# Altium PCB 20K Control Board V1.1.PcbDoc (part 24 of 24)
Units mm, origin at the board's own origin, x right, y up, seen from the top; angles counter-clockwise.
Board outline 132 x 260 mm, 4 copper layers (Top Layer, GND, VCC, Bottom Layer); 1384 components, 779 nets, 4515 pads, 1774 vias.
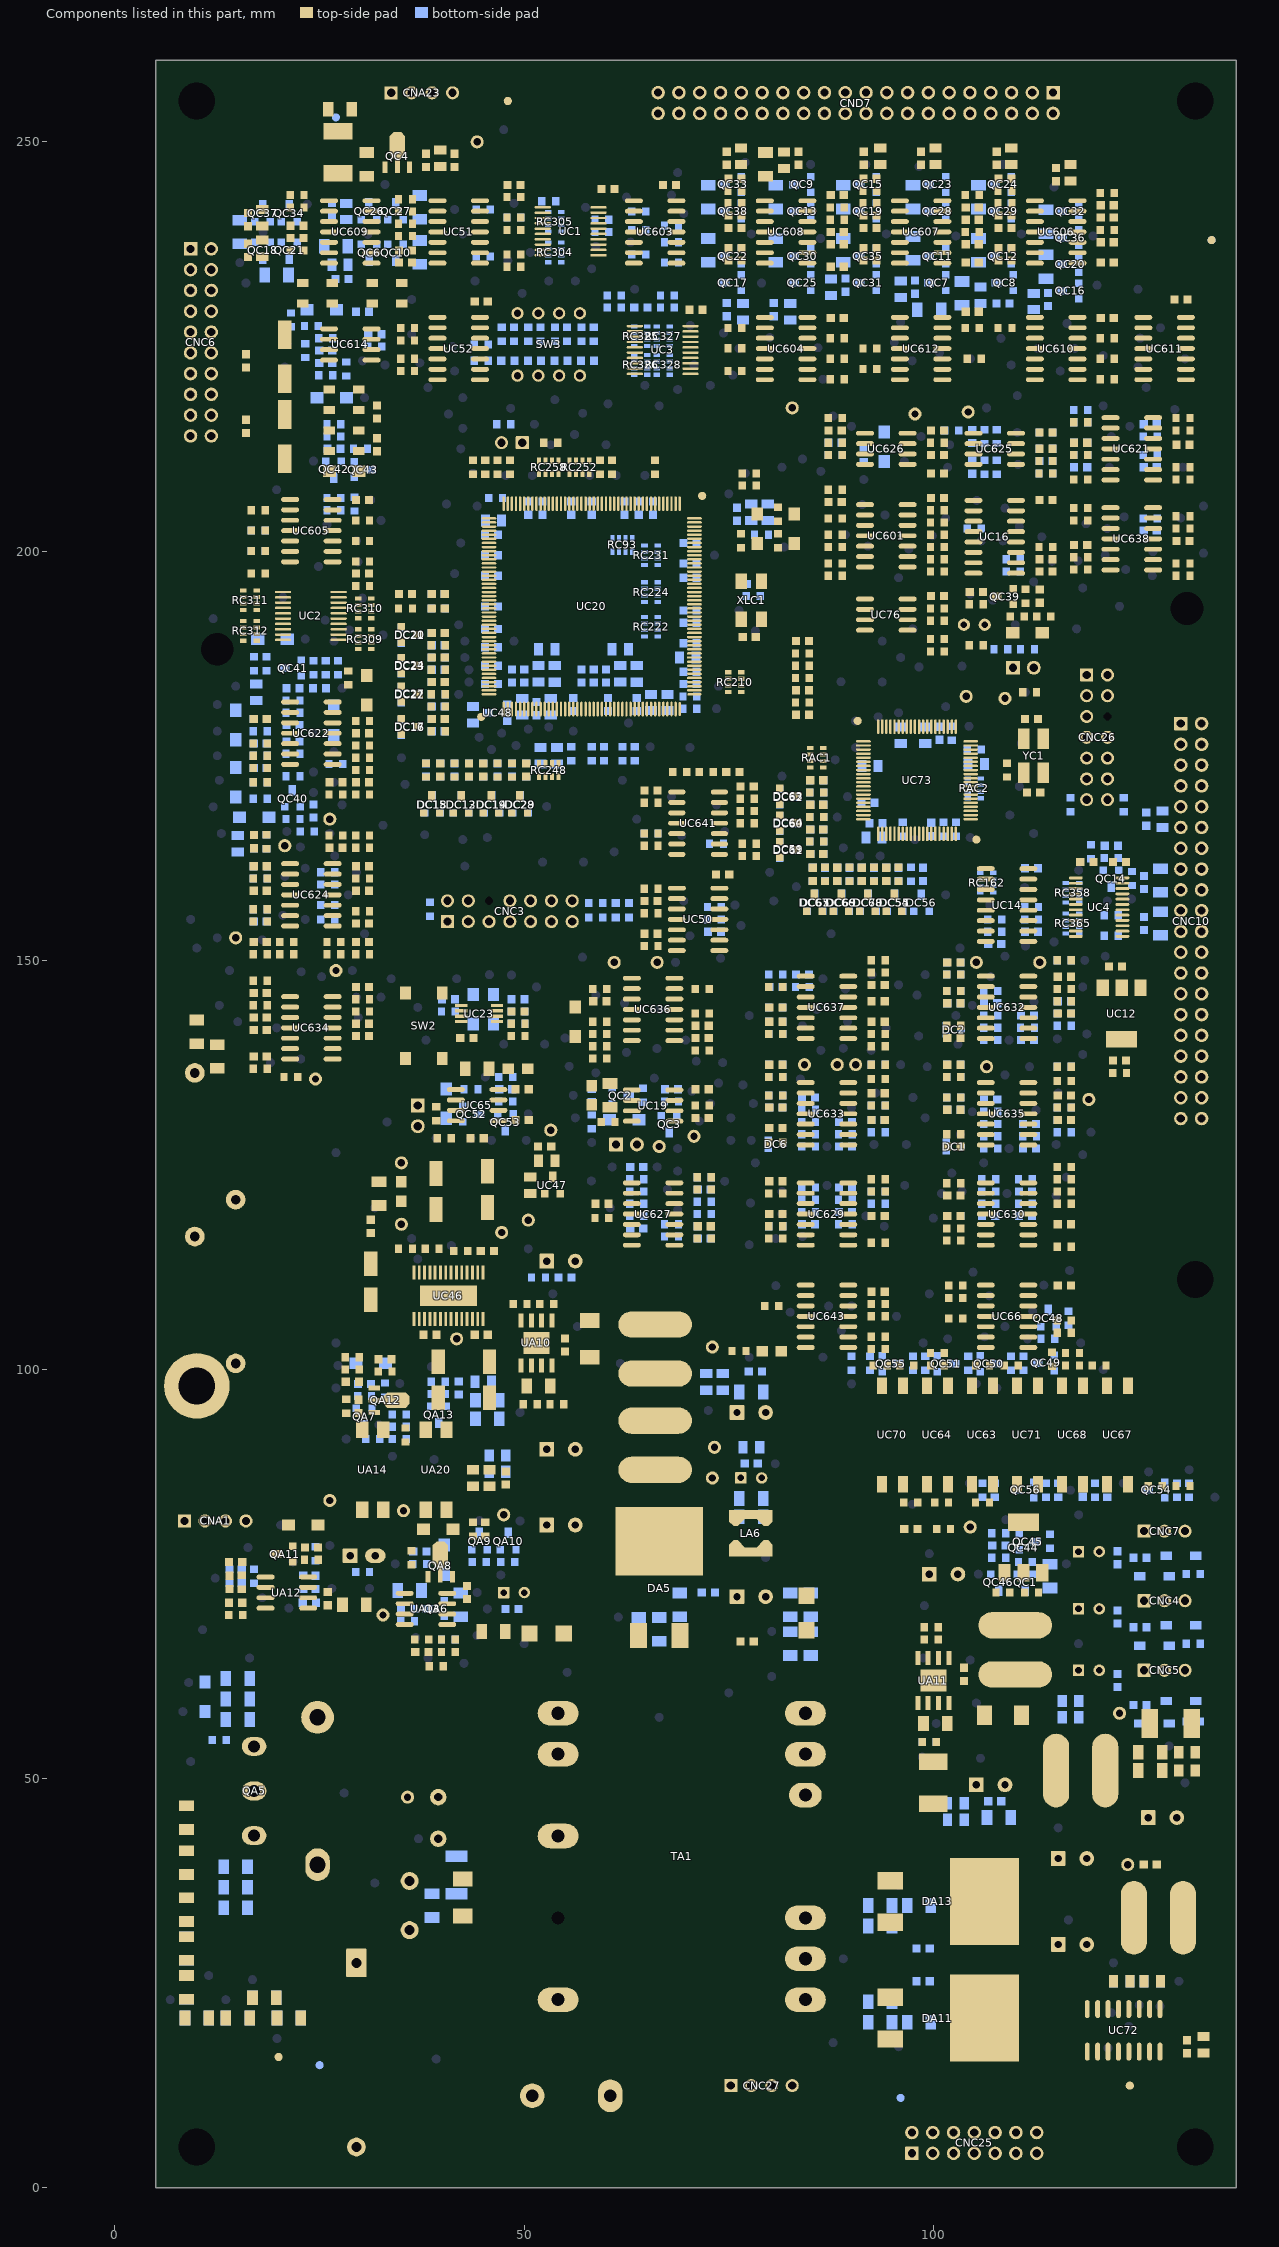
[diagram p26: the components of this part, seen from the top]

## Silkscreen, mask and mechanical layers (free items; w line width, h text height) (continued)
Mechanical 16:
  circle w0.1: c15.75,90.75 r5
  circle w0.1: c14.5,90 r5
  circle w0.1: c21,97.25 r5
  circle w0.1: c14.75,120.75 r11.5
  circle w0.1: c60.25,53.5 r2.75
  circle w0.1: c90.25,77.25 r5
  circle w0.1: c84.5,41 r5
  circle w0.1: c128.75,94 r5
  circle w0.1: c126.25,92.25 r5
  circle w0.1: c91.25,64.5 r5
  circle w0.1: c91,61.5 r5
  circle w0.1: c92,58.5 r5
  circle w0.1: c87.25,80.5 r5
  circle w0.1: c89.5,90.75 r5
  circle w0.1: c46.75,50 r2.75
  circle w0.1: c57.5,16.25 r2.75
  circle w0.1: c50.75,6.75 r2.75
  circle w0.1: c56,11 r2.75
  circle w0.1: c32.75,62.5 r2.75
  circle w0.1: c21.75,66.5 r2.75
  circle w0.1: c31,66 r2.75
  circle w0.1: c27,66.5 r2.75
  circle w0.1: c89.5,78.25 r5
  circle w0.1: c92.15,71 r5
  circle w0.1: c67.75,10.75 r5
  circle w0.1: c14.75,100.75 r12.4
  circle w0.1: c9.75,116.25 r12.4
  circle w0.1: c89.5,43 r5
  circle w0.1: c91.75,48.75 r5
  circle w0.1: c34.25,8.25 r2.75
  circle w0.1: c32,16 r2.75
  circle w0.1: c12.5,48.5 r2.75
  circle w0.1: c27,23.25 r2.75
  circle w0.1: c92,53.25 r5
  circle w0.1: c87.25,88.75 r5
  circle w0.1: c17.5,65.25 r2.75
  circle w0.1: c19,66.25 r2.75
  circle w0.1: c16.75,62.75 r2.75
  circle w0.1: c13,46.5 r2.75
  circle w0.1: c52.75,48 r2.75
  circle w0.1: c21,39.25 r2.75
  circle w0.1: c21,101 r5
  circle w0.1: c21.25,121 r5
  circle w0.1: c19.75,125 r5
  circle w0.1: c42.25,44.5 r1.5
  lines w0.1: 26.5,89.6 26.5,122.25
  lines w0.2: -1,250 16.5,250 ; 4.75,255 136.75,255 ; 5,1 137,1 ; 5,3 137,3 ; 5,5 137,5 ; 5,257 137,257 ; 5,259 137,259 ; 6,-10 6,260 ; 8,-10 8,260 ; 10,-10 10,260 ; 44.75,252.8 55.25,252.8 ; 44.75,256.75 55.25,256.75 ; 97.25,53 97.25,62.25 ; 123.7,-2.8 123.7,1.3 ; 132,-10 132,260 ; 134,-10 134,260 ; 136,-10 136,260
Drill Drawing:
  lines w0.2: 285.5,5.5 358.5,5.5 ; 285.5,11.25 359.5,11.25 368.75,11.25 ; 303.5,0 303.5,22.5 ; 329.25,0 329.25,22.5 ; 329.75,0 329.75,22.5 ; 345.5,0 345.5,22.5 ; 345.5,15 358.5,15 ; 345.5,18.75 358.5,18.75 ; 352,5.5 352,22.5 ; 358.5,22.5 358.5,0 375.75,0 375.75,11.25 ; 366.5,0 285.5,0 285.5,22.5 375.75,22.5 375.75,11.25 ; 367.5,15 375.75,15 ; 367.5,18.75 375.75,18.75 ; 367.5,22.5 367.5,11.25 375.75,11.25
  lines w0.25: 291.024,219 351.976,219 ; 291.024,223.555 351.976,223.555 ; 289.5,189.95 ccw(c290.95,189.95) 290.95,188.5 352.05,188.5 ccw(c352.05,189.95) 353.5,189.95 353.5,227.55 ccw(c352.05,227.55) 352.05,229 290.95,229 ccw(c290.95,227.55) 289.5,227.55 289.5,189.95
  text "Layer Stack Up Detail for: 20K Control Board V1.1.PcbDoc" at 291.024,225.563 h1.05
  text "Layer" at 291.024,221.855 h1.05
  text "Gerber" at 339.418,221.855 h1.05
  text "Name" at 291.024,219.755 h1.05
  text "Document" at 339.418,219.755 h1.05
  text "Top Solder Mask" at 291.024,216.766 h1.45
  text "(.GTS)" at 339.418,216.766 h1.45
  text "Top Layer" at 291.024,212.547 h1.45
  text "(.GTL)" at 339.418,212.547 h1.45
  text "GND" at 291.024,208.328 h1.45
  text "(.G1)" at 339.418,208.328 h1.45
  text "VCC" at 291.024,204.109 h1.45
  text "(.G2)" at 339.418,204.109 h1.45
  text "Bottom Layer" at 291.024,199.891 h1.45
  text "(.GBL)" at 339.418,199.891 h1.45
  text "Bottom Solder Mask" at 291.024,195.672 h1.45
  text "(.GBS)" at 339.418,195.672 h1.45
  text ".Legend" at 285.5,29.5 h2
  text "1oz:" at 346.5,20 h2
  text "V" at 354.25,20 h2
  text "T=0.45:V" at 368,20 h2
  text "V-CUT" at 360.25,17.25 h2
  text "2oz:" at 346.5,16.25 h2
  text "T=0.55:" at 368,16.25 h2
  text "PCB SIDE" at 286.75,16 h2
  text "Four Side" at 311.5,16 h2
  text "COPPER-CLAD" at 331,16 h2
  text "±0.1mm" at 359.75,15.25 h2
  text "3oz:" at 346.5,12.5 h2
  text "NA:" at 368.25,12.25 h2
  text "PCB THICKNESS" at 286.75,7.5 h2
  text "1.6" at 309.5,7.5 h2
  text "+0.3/-0.1mm" at 312.5,7.5 h2
  text "PCB MATERIAL" at 331,7.5 h2
  text "FR-4" at 347.25,7.5 h2
  text "HASL" at 353.5,7.5 h2
  text "Green Solder Mask" at 359.75,6.25 h2
  text "White Silkscreem" at 360.5,4 h2
  text "SAFETY" at 286.75,2.25 h2
  text "UL94V-0 140℃ CTI ≥175" at 306.25,2.25 h2
  text "PTH" at 334,2.25 h2
  text "≥25μm" at 349.75,2.25 h2

## Dimensions
0,0 to 5,0 on Drill Drawing
269,0 to 274,0 on Drill Drawing
0,260 to 0,0 on Drill Drawing
269,0 to 263.75,-3.5 on Drill Drawing
5,0 to 9.25,-2.25 on Drill Drawing
20,16 to 25.5,-6.25 on Drill Drawing
25,14.75 to 30.5,-3.75 on Drill Drawing
124,12.25 to 129.5,-6.25 on Drill Drawing
96,10.742 to 101.75,-6 on Drill Drawing
134.25,238 to 142,235.75 on Drill Drawing
48,255.25 to 42.5,269.5 on Drill Drawing
27,253 to 26.5,264.5 on Drill Drawing
274,2 to 0,2 on Drill Drawing
137,0.75 to 142.25,4.25 on Drill Drawing

## Text inside footprints (layer, text, board x,y; h text height)
CNC3: Top Overlay "13" at 61.25,154 h1; Top Overlay "14" at 61.25,157.5 h1; Top Overlay "1" at 41.25,149.75 h1; Top Overlay "2" at 37.9,160.975 h1; Bottom Overlay "2" at 40.75,159 h1; Bottom Overlay "1" at 40.5,152.5 h1; Bottom Overlay "14" at 56.25,159 h1; Bottom Overlay "13" at 56,152 h1
CNC6: Top Overlay "19" at 6.25,201 h1; Top Overlay "20" at 13,201 h1; Top Overlay "1" at 6.75,248.75 h1; Top Overlay "2" at 14,248.75 h1; Bottom Overlay "2" at 11.186,238.708 h1.27 r270; Bottom Overlay "1" at 8.646,238.835 h1.27 r270; Bottom Overlay "20" at 11.414,210.59 h1.27 r270; Bottom Overlay "19" at 8.62,210.666 h1.27 r270
CNC10: Top Overlay "2" at 134.5,191 h1; Top Overlay "1" at 126.25,188.25 h1; Top Overlay "40" at 134.5,117.5 h1; Top Overlay "39" at 126.75,117.5 h1; Bottom Overlay "39" at 131,127.5 h1; Bottom Overlay "40" at 134,127.5 h1; Bottom Overlay "1" at 130.25,180.75 h1; Bottom Overlay "2" at 133.25,180.75 h1
CNC25: Top Overlay "13" at 125.25,1.5 h1; Top Overlay "14" at 125,8.25 h1; Top Overlay "2" at 87.5,10.5 h1; Top Overlay "1" at 85,1.5 h1; Top Overlay "11" at 111.98,3.75 h1; Bottom Overlay "1" at 95.345,3.8 h1; Bottom Overlay "2" at 95.495,6.3 h1; Bottom Overlay "14" at 115.536,6.3 h1; Bottom Overlay "13" at 115.386,3.8 h1
CNC26: Top Overlay "13" at 113.25,167.75 h1; Top Overlay "14" at 125,167.75 h1; Top Overlay "1" at 114.25,184.25 h1; Bottom Overlay "2" at 121.5,186.5 h1; Bottom Overlay "1" at 119,186.5 h1; Bottom Overlay "14" at 122,167 h1; Bottom Overlay "13" at 119.5,167 h1
CND7: Top Overlay "39" at 62.5,249 h1; Top Overlay "40" at 62.5,247.5 h1; Top Overlay "1" at 114.75,249.25 h1; Top Overlay "2" at 114.5,247.75 h1; Bottom Overlay "2" at 117,253 h1; Bottom Overlay "1" at 117,255.5 h1; Bottom Overlay "40" at 64.75,253.25 h1; Bottom Overlay "39" at 64.75,255.5 h1
PN1: Top Overlay "PN:" at 13.25,175.25 h3 r270
QA5-HS: Mechanical 16 "In this area" at 15.75,54.25 h1 r270; Mechanical 16 "Ban placed more than 28 MM" at 13.25,60.75 h1 r270
SC1: Top Overlay "M4" at 12,9 h1
SC2: Top Overlay "M4" at 128.25,9.25 h1
SC3: Top Overlay "M4" at 126.75,114.75 h1
SC4: Top Overlay "M4" at 126.5,251 h1
SC5: Top Overlay "M4" at 14.5,257.25 h1
SC6: Top Overlay "M4" at 6.5,103.25 h1
SW2: Top Overlay "2" at 35.25,147.25 h0.94; Top Overlay "4" at 39.75,147.25 h0.94; Top Overlay "1" at 35.25,136 h0.94; Top Overlay "3" at 39.5,136 h0.94
SW3: Top Overlay "1" at 48.75,216.25 h1; Top Overlay "8" at 48.75,231.25 h1
UC12: Top Overlay "G" at 125,148.05 h1; Top Overlay "I" at 119.75,149 h1 r180; Mechanical 16 "SOT-223" at 126.35,144.5 h1 r180